# Altium PCB MainBoard_PCB2.PcbDoc
Units mil, origin at the board's own origin, x right, y up, seen from the top; angles counter-clockwise.
Board outline 3100 x 1500 mil, 2 copper layers (Top Layer, Bottom Layer), stack 65.8 mil thick; 35 components, 23 nets, 172 pads, 11 vias.
Unrouted connection lines stored in the file: 1.
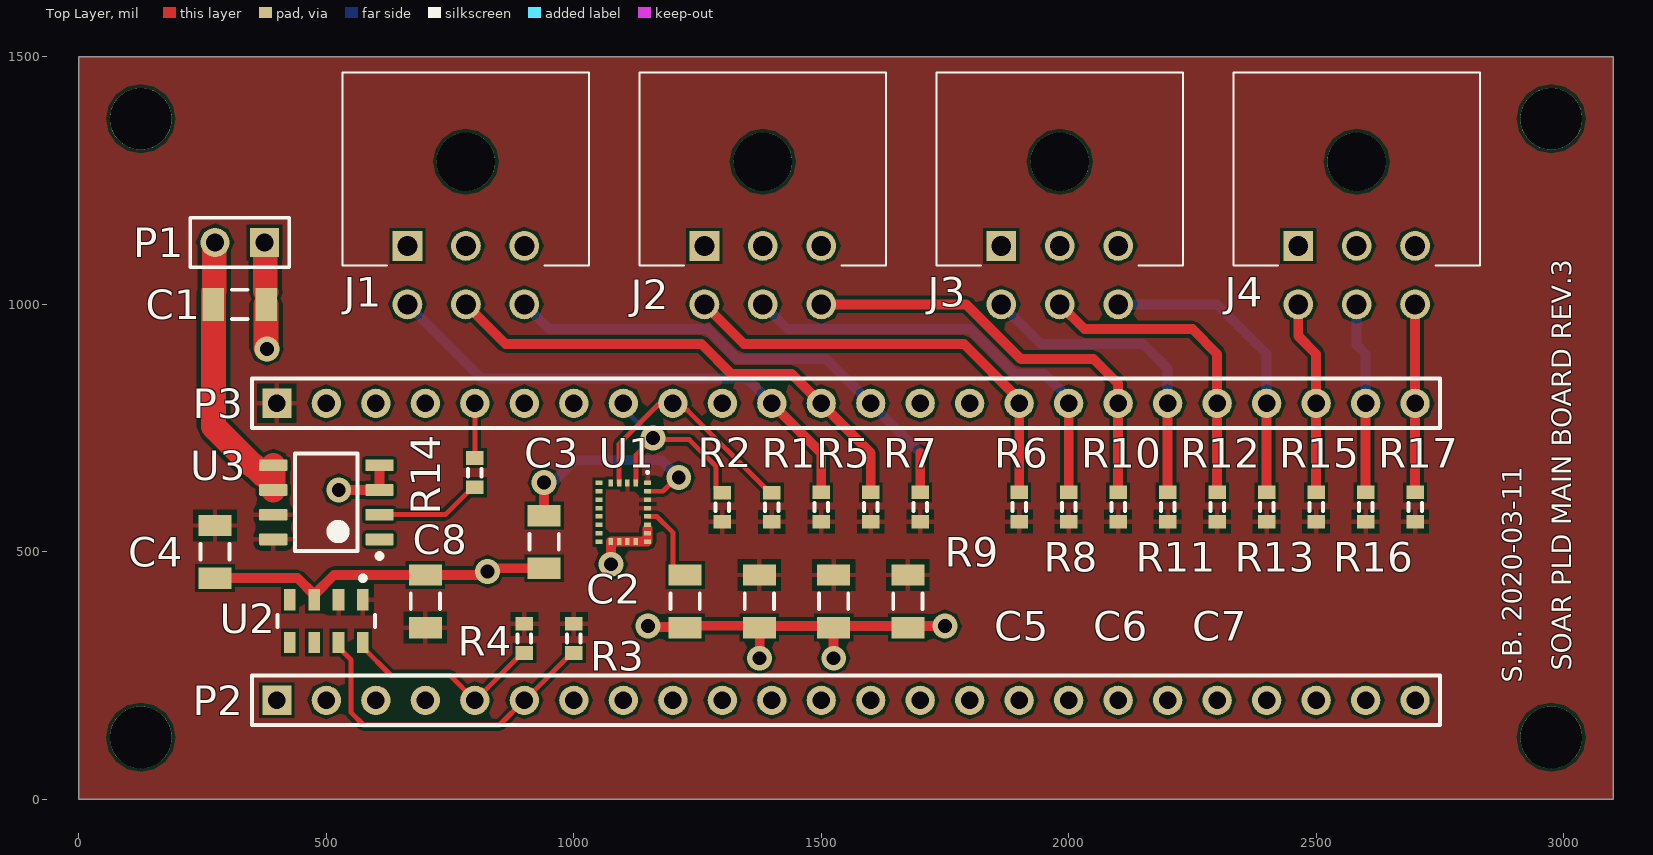
[diagram p0: Top Layer view]
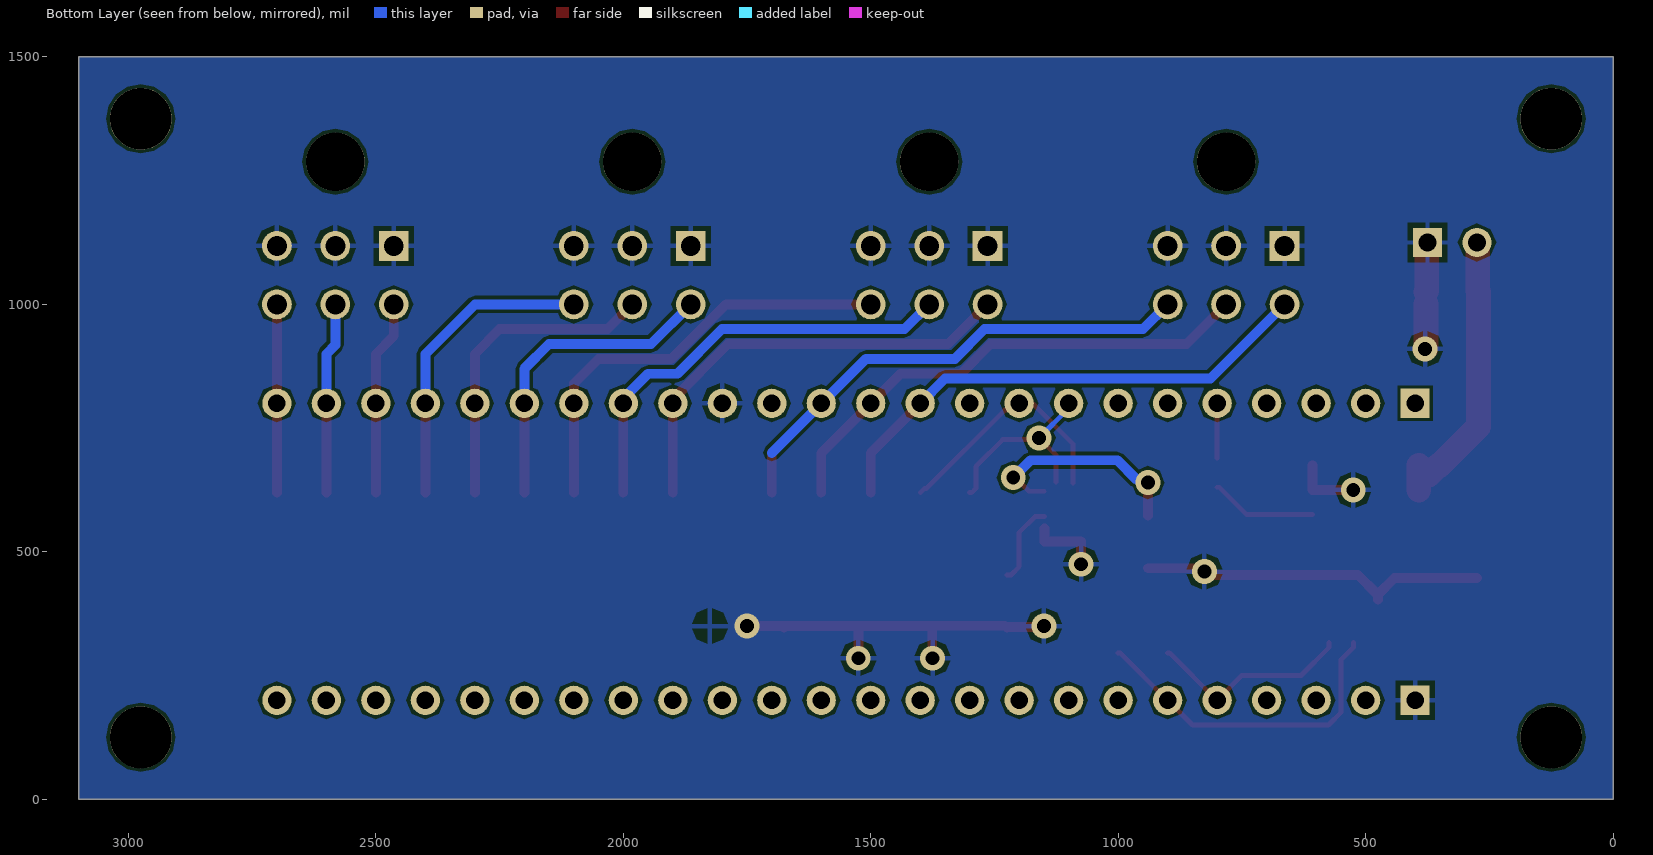
[diagram p1: Bottom Layer view, seen from below]

## Layer stack, top to bottom
Top Solder: solder mask 0.4, Solder Resist, Dk 3.5
Top Layer: signal copper 1.4
Dielectric 1: dielectric 63, FR-4, Dk 4.8
Bottom Layer: signal copper 1.4
Bottom Solder: solder mask 0.4, Solder Resist, Dk 3.5

## Board outline
0,0 3100,0 3100,1500 0,1500

## Design rules (kind name [scope] priority, off if disabled: settings)
Clearance [All] p1: gap=6 ignorepadtopadclearanceinfootprint=FALSE
Height [All] p1: minheight=0 maxheight=2000 prefheight=500
HoleSize [All] p1: absolutevalues=TRUE maxlimit=200 minlimit=1 maxpercent=80.000 minpercent=20.000
MinimumAnnularRing [All] p1: minimumring=10
MinimumSolderMaskSliver [All] p1: minsoldermaskwidth=6
PolygonConnect [All] p1: connectstyle=Relief reliefconductorwidth=10 reliefentries=4 polygonreliefangle="90 Angle" airgapwidth=10
RoomDefinition MainBoard_Sheet1 [InComponentClass('MainBoard_Sheet1')] p1: confinementstyle=ConfineIn formatcopy=TRUE lockcomponents=FALSE outline -3800,-2900 -1800,-2900 -1800,-1900 -3800,-1900
RoutingVias [All] p1: holewidth=28 width=50 viastyle="Through Hole" minholewidth=28 minwidth=50 maxholewidth=28 maxwidth=50
SilkToSolderMaskClearance [IsPad] p1: minsilkscreentomaskgap=6 clearancetoexposedcopper=TRUE
SolderMaskExpansion [All] p1: expansion=4 istentingtop=FALSE
UnRoutedNet [All] p1: checkbadconnections=TRUE
Width [All] p1: maxlimit=50 minlimit=6 preferedwidth=10
25 further rules are at their usual default settings.

## Components (designator, comment, footprint, x,y, rotation, side; value= is the part's Value field where it differs from the comment)
C1 "Cap Semi" C1206 325,1000 r180 top value=0.1uF
C2 "Cap Semi" C1206 1225,400 r90 top value=10nF
C3 "Cap Semi" C1206 940,520 r90 top value=0.1uF
C4 "Cap Semi" C1206 275,500 r90 top value=0.1uF
C5 "Cap Semi" C1206 1375,400 r90 top value=10uF
C6 "Cap Semi" C1206 1525,400 r90 top value=0.1uF
C7 "Cap Semi" C1206 1675,400 r90 top value=0.1uF
C8 "Cap Semi" C1206 700,400 r270 top value=10uF
J1 "0430450600" 0430450600 780.91,1203.15 r180 top
J2 "0430450600" 0430450600 1380.91,1203.15 r180 top
J3 "0430450600" 0430450600 1980.91,1203.15 r180 top
J4 "0430450600" 0430450600 2580.91,1203.15 r180 top
P1 "Header 2" HDR1X2 375,1125 r180 top
P2 "Header 24" HDR1X24 400,200 r0 top
P3 "Header 24" HDR1X24 400,800 r0 top
R1 "Res3" J1-0603 1400,590 r270 top value=10K
R2 "Res3" J1-0603 1300,590 r270 top value=10K
R3 "Res3" J1-0603 1000,325 r90 top value=10K
R4 "Res3" J1-0603 900,325 r90 top value=10K
R5 "Res3" J1-0603 1500,590.47 r90 top value=10K
R6 "Res3" J1-0603 1900,590.47 r90 top value=10K
R7 "Res3" J1-0603 1600,590.47 r90 top value=10K
R8 "Res3" J1-0603 2000,590.47 r90 top value=10K
R9 "Res3" J1-0603 1700,590.47 r90 top value=10K
R10 "Res3" J1-0603 2100,590.47 r90 top value=10K
R11 "Res3" J1-0603 2200,590.47 r90 top value=10K
R12 "Res3" J1-0603 2300,590.47 r90 top value=10K
R13 "Res3" J1-0603 2400,590.47 r90 top value=10K
R14 "Res3" J1-0603 800,660 r270 top value=250K
R15 "Res3" J1-0603 2500,590.47 r90 top value=10K
R16 "Res3" J1-0603 2600,590.47 r90 top value=10K
R17 "Res3" J1-0603 2700,590.47 r90 top value=10K
U1 "LSM9DS1TR" STM-LGA-24_3500X3000X1000 1100,580 r270 top
U2 "MS560702BA03-50" TECO-MS560702BA03-50_V 500,360 r270 top
U3 "TPS76633DR" D0008A_N 500,600 r180 top

## Footprints (in the part's own frame and the unit in brackets; to place one, negate y for a bottom-side part, rotate by r counter-clockwise, add the part's x,y. Pads: shape width x height; smd on the part's side, far side on the other; paste and mask are expansions set on the pad)
0430450600 [mm] "6-Pin Molex 3.00mm Pitch"
  round 3 hole 3 unplated mask+0.05: 0(-0.025,-2.16)
  rect 1.53x1.53 hole 1.02 mask+0.05: 1(2.975,2.16)
  round 1.53 hole 1.02 mask+0.05: 2(-0.025,2.16) 3(-3.025,2.16) 4(2.975,5.16) 5(-0.025,5.16) 6(-3.025,5.16)
  silkscreen extent -6.35,-6.75 6.3,3.17, body extent -6.6,-6.7 6.55,5.54, height 8.28
C1206 [mm] "Chip Capacitor, Body 3.2x1.6mm, IPC High Density"
  rect 1.1x1.7 smd: 1(-1.35,0) 2(1.35,0)
  silkscreen extent -0.4,-0.75 0.4,0.75, body extent -1.7,-0.9 1.7,0.9, height 1.3
D0008A_N [mm] "SOIC, 8-Leads, Body 5x4mm, Pitch 1.27mm, IPC Medium Density"
  rrect17% 1.45x0.6 smd: 1(-2.725,1.905) 2(-2.725,0.635) 3(-2.725,-0.635) 4(-2.725,-1.905) 5(2.725,-1.905) 6(2.725,-0.635) 7(2.725,0.635) 8(2.725,1.905)
  silkscreen extent -2.85,-2.5 1.6,2.88, body extent -3,-2.45 3,2.45, height 1.63
HDR1X2 [mm] "Connector; Header; 2 Position"
  rect 1.5x1.5 hole 0.9: 1(0,0)
  round 1.5 hole 0.9: 2(2.54,0)
  silkscreen extent -1.27,-1.27 3.81,1.27
HDR1X24 [mm] "Connector; Header; 24 Position"
  rect 1.5x1.5 hole 0.9: 1(0,0)
  round 1.5 hole 0.9: 2(2.54,0) 3(5.08,0) 4(7.62,0) 5(10.16,0) 6(12.7,0) 7(15.24,0) 8(17.78,0) 9(20.32,0) 10(22.86,0) 11(25.4,0) 12(27.94,0) 13(30.48,0) 14(33.02,0) 15(35.56,0) 16(38.1,0) 17(40.64,0) 18(43.18,0) 19(45.72,0) 20(48.26,0) 21(50.8,0) 22(53.34,0) 23(55.88,0) 24(58.42,0)
  silkscreen extent -1.27,-1.27 59.69,1.27
J1-0603 [mm] "Chip Resistor, Body 1.6x0.8mm, IPC High Density"
  rect 0.7x0.9 smd: 1(-0.75,0) 2(0.75,0)
  silkscreen extent -0.2,-0.35 0.2,0.35, body extent -0.85,-0.48 0.85,0.48, height 0.9
STM-LGA-24_3500X3000X1000 [mm] "LGA, 24-Leads, Body 3.65x3.15mm, Pitch 0.43mm"
  rect 0.23x0.35 smd mask+0.05: 1(-1.505,1.25) 6(-1.505,-1.25) 7(-1.075,-1.25) 8(-0.645,-1.25) 9(-0.215,-1.25) 10(0.215,-1.25) 11(0.645,-1.25) 12(1.075,-1.25) 13(1.505,-1.25) 18(1.505,1.25) 19(1.075,1.25) 20(0.645,1.25) 21(0.215,1.25) 22(-0.215,1.25) 23(-0.645,1.25) 24(-1.075,1.25)
  rect 0.35x0.23 smd mask+0.05: 2(-1.505,0.645) 3(-1.505,0.215) 4(-1.505,-0.215) 5(-1.505,-0.645) 14(1.505,-0.645) 15(1.505,-0.215) 16(1.505,0.215) 17(1.505,0.645)
  silkscreen extent -2.11,1.19 -1.98,1.31, body extent -1.82,-1.57 1.83,1.58, height 1.03
TECO-MS560702BA03-50_V [mm] "SMD, 8-Leads, Body 3x5mm, Pitch 1.25mm"
  rect 1.1x0.6 smd: 1(-1.1,1.875) 2(-1.1,0.625) 3(-1.1,-0.625) 4(-1.1,-1.875) 5(1.1,-1.875) 6(1.1,-0.625) 7(1.1,0.625) 8(1.1,1.875)
  silkscreen extent -2.32,-2.5 0.32,2.5, body extent -1.5,-2.5 1.5,2.5, height 1

## Part data
C1 C2 C3 C4 C5 C6 C7 C8: "Capacitor (Semiconductor SIM Model)", LatestRevisionDate=29-May-2009, LatestRevisionNote="IPC-7351 Footprint Added.", PackageDescription="Chip Capacitor", PackageReference=C1206, Published=8-Jun-2000, Publisher="Altium Limited"
J1 J2 J3 J4: "CONN HEADER R/A 6POS 3MM", Current Rating (Amps)=8A, Insulation Color=Black, Manufacturer=Molex, Material Flammability Rating="UL94 V-0", Supplier Part Number 1=WM1815-ND, Voltage Rating=600V, ComponentLink1Description=Drawing, ComponentLink1URL=https://www.molex.com/pdm_docs/sd/430450600_sd.pdf, ComponentLink2Description="Product Specification", ComponentLink2URL=https://www.molex.com/pdm_docs/ps/PS-43045.pdf, Contact Finish - Mating=Tin, Contact Finish - Post=Tin, Contact Finish Thickness - Mating="100.0µin (2.54µm)", Contact Length - Post="0.125\" (3.18mm)", Contact Material=Brass, Contact Shape=Square, Contact Type="Male Pin", Fastening Type="Locking Ramp", Features="Board Lock", Insulation Height="0.290\" (7.37mm)", Insulation Material="Liquid Crystal Polymer (LCP), Glass Filled", Manufacturer Part Number=0430450600, Mounting Type="Through Hole, Right Angle", Number of Positions=6, Number of Rows=2, Row Spacing - Mating="0.118\" (3.00mm)", Shrouding="Shrouded - 4 Wall", Supplier 1=Digi-Key, Termination=Solder
P1: "Header, 2-Pin", LatestRevisionDate=17-Jul-2002, LatestRevisionNote="Re-released for DXP Platform.", Publisher="Altium Limited"
P2 P3: "Header, 24-Pin", LatestRevisionDate=17-Jul-2002, LatestRevisionNote="Re-released for DXP Platform.", Publisher="Altium Limited"
R1 R2 R3 R4 R5 R6 R7 R8 R9 R10 R11 R12 R13 R14 R15 R16 R17: "Resistor", LatestRevisionDate=29-May-2009, LatestRevisionNote="IPC-7351 Footprint Added.", PackageDescription="Chip Resistor", PackageReference=J1-0603, Published=8-Jun-2000, Publisher="Altium Limited"
U1: library part CMP-2000-06606-1, "iNEMO Inertial Module: 3D Accelerometer, 3D Gyroscope, 3D Magnetometer, 1.9 to 3.6 V, -40 to 85 degC, 24-Pin LGA, RoHS, Tape and Reel", Manufacturer=STMicroelectronics, Package Description="24-Pin Plastic Land Grid Array Package, Body 3.65 x 3.15 mm, Pitch 0.43 mm", Package Reference=LGA-24_3500X3000X1000, PartNumber=LSM9DS1, Sensor Case Style=LGA, Supply Voltage Max=3.6V, Supply Voltage Min=1.9V, Acceleration Range=±2g,±4g,±8g,±16g, Datasheet URL=http://www2.st.com/content/ccc/resource/technical/document/datasheet/1e/3f/2a/d6/25/eb/48/46/DM00103319.pdf/files/DM00103319.pdf/jcr:content/translations/en.DM00103319.pdf, Datasheet Version="Rev. 3, 03/2015", Gyroscope Range=±245°/s,±500°/s,±2000°/s, Manufacturer URL=http://www.st.com/, MEMS Module Function=Tri-AxisGyroscope,Tri-AxisAccelerometer,Tri-AxisMagnetometer, Mounting Technology=SurfaceMount, MSL=MSL3-168hours, No. of Pins=24Pins, Packaging=CutTape, Product Range=-, SVHC=NoSVHC(17-Dec-2015)
U2: library part CMP-2000-07512-1, "Barometric Pressure Sensor, with Stainless Steel Cap , 1.8 to 3.6 V, -40 to 85 degC, 8-Pin SMD, RoHS, Tape and Reel", Manufacturer="TE Connectivity", Package Description="8-Pin Surface Mount Device, Body 3 x 5 mm, Pitch 1.25 mm", Datasheet URL=http://www.te.com/commerce/DocumentDelivery/DDEController?Action=showdoc&DocId=Data+Sheet%7FMS5607-02BA03%7FB2%7Fpdf%7FEnglish%7FENG_DS_MS5607-02BA03_B2.pdf%7FMS560702BA03-50, Datasheet Version=06/2017, Lead Free=LeadFree, Manufacturer URL=http://www.te.com/, Mounting Technology=SurfaceMount, Package Reference=MS560702BA03-50, RoHSCompliant=false
U3: library part CMP-0394-00013-2, "Single Output LDO, 250 mA, Fixed 3.3 V Output, 2.7 to 10 V Input, with Low IQ, 8-pin SOIC (D), -40 to 125 degC, Green (RoHS & no Sb/Br)", Manufacturer="Texas Instruments", Power Good=TRUE, Code_JEDEC=MS-012, ComponentLink1Description="Manufacturer URL", ComponentLink1URL=http://www.ti.com/, ComponentLink2Description=Datasheet, ComponentLink2URL=http://www.ti.com/general/docs/lit/getliterature.tsp?genericPartNumber=TPS76633&fileType=pdf, ComponentLink3Description="Package Specification", ComponentLink3URL=http://www.ti.com/litv/pdf/msoi002j, DatasheetVersion=SLVS237C, Eco-Plan="Green (RoHS & no Sb/Br)", Fixed Output Options(V)=3.3, Iout(Max)(A)=0.25, Iq(Typ)(mA)=0.03, Mounting Technology="Surface Mount", PackageDescription="8-Pin Plastic Small Outline, Body 4.9 x 3.9 mm, Pitch 1.27 mm", PackageReference=D0008A, PackageVersion=4040047-3/M, PartNumber=TPS76633DR, SubFamily="Single Channel LDO", Vdo(Typ)(mV)=230, Vin(Max)(V)=10, Vin(Min)(V)=2.7, Vout Adj(Max)(V)=3.3, Vout Adj(Min)(V)=3.3

## Free pads (board coordinates)
  round 125 hole 125: ""(125,125) ""(125,1375) ""(2975,125) ""(2975,1375)

## Via types
v1: diameter 50, hole 28, Top Layer to Bottom Layer, 10 vias
v2: diameter 50, hole 28, Top Layer to Bottom Layer, tented top, 1 vias

## Nets (pads, with @x,y where several pads share a name; then routed paths per layer and width w, separated by ;. In a path a pad name is that pad's centre, name@x,y a point inside that pad or via, vN(x,y) a via of type N, cw(c..) or ccw(c..) an arc to the next point about the centre after c; other vN are vias at no path point)
A0: J1.6 P3.13 R9.2 | length 1004.3
  Top Layer w20: R9.2 1700,700
  Bottom Layer w20: J1.6 950.12,949.88 1270.12,949.88 1330.12,889.88 1510.12,889.88 1700,700
A1: J1.5 P3.12 R7.2 | length 1022.4
  Top Layer w20: J1.5 862.01,919.88 1257.69,919.88 1317.69,859.88 1440.12,859.88 1600,700 R7.2
A2: J1.4 P3.11 R5.2 | length 1045.8
  Top Layer w20: J1.4@660,996.22 J1.4 ; P3.11 1500,700 R5.2
  Bottom Layer w20: J1.4 813.78,850 1350,850 P3.11
A14: J4.6 P3.24 R17.2 | length 380
  Top Layer w20: R17.2 P3.24 J4.6
A15: J4.5 P3.23 R16.2 | length 387.5
  Top Layer w20: R16.2 P3.23
  Bottom Layer w20: J4.5 2581.89,918.11 2600,900 P3.23
A16: J4.4 P3.22 R15.2 | length 395
  Top Layer w20: J4.4 2463.78,936.22 2500,900 P3.22 R15.2
A17: J3.6 P3.21 R13.2 | length 621.4
  Top Layer w20: R13.2 P3.21
  Bottom Layer w20: J3.6 2300,1000 2400,900 P3.21
A18: J3.5 P3.20 R12.2 | length 639.5
  Top Layer w20: J3.5 2032.01,949.88 2250.12,949.88 2300,900 P3.20 R12.2
A19: J3.4 P3.19 R11.2 | length 646.2
  Top Layer w20: J3.4 J3.4@1870,1000 ; R11.2 P3.19
  Bottom Layer w20: J3.4 1943.9,919.88 2150,919.88 2200,869.88 P3.19
A20: J2.6 P3.18 R10.2 | length 886.2
  Top Layer w20: J2.6 1792.9,1000 1903.02,889.88 2050,889.88 2099.88,840 2099.88,800.12 P3.18 R10.2
A21: J2.5 P3.17 R8.2 | length 886.7
  Top Layer w20: R8.2 P3.17 P3.17@2000,809.88
  Bottom Layer w20: J2.5 1432.01,949.88 1800.59,949.88 1890.59,859.88 1950,859.88 P3.17@2000,809.88
A22: J2.4 P3.16 R6.2 | length 903.8
  Top Layer w20: J2.4 1343.9,919.88 1788.17,919.88 1900,808.05 P3.16 R6.2
GND: C1.1 C2.1 C3.1 C4.1 C5.1 C6.1 C7.1 C8.1 J1.1 J1.2 J1.3 J2.1 J2.2 J2.3 J3.1 J3.2 J3.3 J4.1 J4.2 J4.3 P1.1 P2.1 P3.15 U1.14 U1.15 U1.16 U1.17 U1.18 U1.19 U1.20 U2.3 U3.3 U3.4 | length 1915.5
  Top Layer w20: C4.1 441.69,446.85 U2.3@475.39,413.15 ; U2.3 U2.3@475.39,413.15 ; v1(525,625) U3.3 U3.4 ; C3.1 832.68,466.85 v1(825.83,460) 818.98,453.15 C8.1 515.39,453.15 U2.3@475.39,413.15 ; v1(1075,475) 1075,520.2 1075.08,520.28 U1.14 U1.15 U1.16 U1.17 U1.18 U1.19 1149.21,547.01 ; v1(1150,350) 1151.57,348.43 1223.43,348.43 C2.1 1228.7,350.55 1371.3,350.55 1375.7,346.15 1375.7,285.7 v1(1375,285) ; C5.1@1375,350 1521.85,350 C6.1 ; v1(1525,285) C6.1 ; v1(1750,350) 1678.15,350 C7.1 1671.85,350 1528.15,350 C6.1
  Top Layer w50: P1.1@376.57,1125 376.57,1026.57 C1.1@378.15,1025 ; C1.1 378.15,911.85 v1(380,910)
NetC1_2: C1.2 P1.2 U3.5 U3.6 | length 566.1
  Top Layer w50: P1.2@275,1126.57 273.43,1125 273.43,1026.57 271.85,1025 C1.2 271.85,753.15 350.65,674.35 353.01,674.35 372.54,654.82 ; U3.6 392.72,654.82 U3.5
NetC2_2: C2.2 U1.21 | length 165.5
  Top Layer w10: U1.21 1149.69,571.06 1168.17,571.06 1200,539.24 1200,469.8 1216.65,453.15 C2.2
NetC3_2: C3.2 U1.24 | length 436.6
  Top Layer w9: U1.24 1180.2,622.32
  Top Layer w10: 1180.2,622.32 1207.87,650 v2(1212.16,650)
  Top Layer w20: C3.2 v1@940,630
  Bottom Layer w20: v1(940,640) 945.74,645.74 962.46,645.74 1001.72,685 1177.16,685 v2(1212.16,650)
NetR14_2: R14.2 U3.2 | length 215.7
  Top Layer w10: U3.2 740.59,575 796.06,630.47 R14.2
PWR_OK: P3.5 R14.1 | length 110.5
  Top Layer w10: R14.1 P3.5
SCL0: P3.8 R2.1 U1.2 | length 409.8
  Top Layer w10: U1.2@1125.39,641.14 1125.39,695.39 v1(1160,730) 1163.52,726.48 1233.52,726.48 1287.28,672.72 1287.28,628.31 1296.06,619.53 R2.1
  Bottom Layer w10: P3.8 1100,790 v1(1160,730)
SCL2: P2.5 R4.1 U2.8 | length 419.8
  Top Layer w10: U2.8 573.82,306.85 630.67,250 750,250 P2.5 800.59,200 896.06,295.47 R4.1
SDA0: P3.9 R1.1 U1.4 | length 496
  Top Layer w10: U1.4 1091.54,718.1 1172.26,798.83 1198.83,798.83 P3.9 1213.27,800 1226.96,786.31 1229.28,786.31 1387.28,628.31 1391.22,628.31 R1.1
SDA2: P2.6 R3.1 U2.7 | length 672.8
  Top Layer w10: U2.7 524.61,306.85 550,281.46 550,175 575,150 850,150 P2.6 900.59,200 996.06,295.47 R3.1
VCC: C4.2 C5.2 C6.2 C7.2 C8.2 P3.1 R1.2 R2.2 R3.2 R4.2 R5.1 R6.1 R7.1 R8.1 R9.1 R10.1 R11.1 R12.1 R13.1 R15.1 R16.1 R17.1 U1.1 U1.3 U1.22 U1.23 U2.1 U2.2 U3.7 U3.8
pads on no net: J1.0 J2.0 J3.0 J4.0 P2.2 P2.3 P2.4 P2.7 P2.8 P2.9 P2.10 P2.11 P2.12 P2.13 P2.14 P2.15 P2.16 P2.17 P2.18 P2.19 P2.20 P2.21 P2.22 P2.23 P2.24 P3.2 P3.3 P3.4 P3.6 P3.7 P3.10 P3.14 U1.5 U1.6 U1.7 U1.8 U1.9 U1.10 U1.11 U1.12 U1.13 U2.4 U2.5 U2.6 U3.1

## Polygon pours and split planes (outlines as drawn)
GND on Bottom Layer "GND_L02_P004" (solid, pour order 4): 0,0 0,1500 3100,1500 3100,0
VCC on Top Layer "VCC_L01_P005" (solid, remove dead copper, pour order 5): 0,0 0,1500 3100,1500 3100,0

## Silkscreen, mask and mechanical layers (free items; w line width, h text height)
Top Overlay:
  text "SOAR PLD MAIN BOARD REV.3" at 3015,260 h40 r90
  text "S.B. 2020-03-11" at 2915,235 h40 r90
Mechanical 1:
  the board outline again, w10